# Altium PCB FPC_MAIN_TO_ES.PcbDoc
Units mil, origin at the board's own origin, x right, y up, seen from the top; angles counter-clockwise.
Board outline 244.62 x 487 mil, 2 copper layers (Top Layer, Bottom Layer), stack 3.76 mil thick; 2 components, 12 nets, 28 pads, 10 vias.
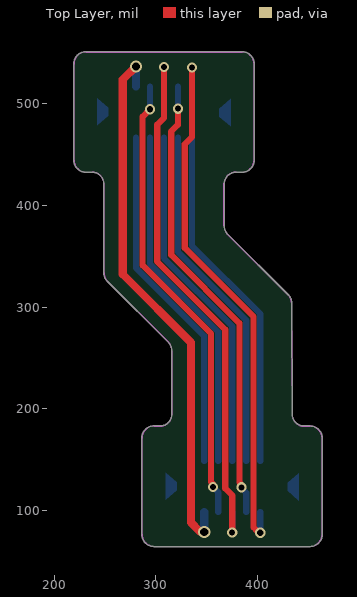
[diagram p0: Top Layer view]
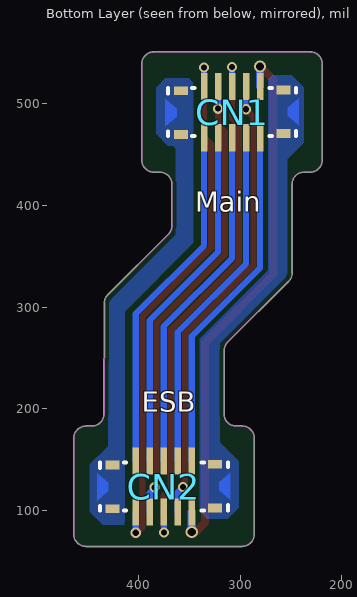
[diagram p1: Bottom Layer view, seen from below]

## Layer stack, top to bottom
Board Layer Stack Top Coverlay 1: solder mask 0.472, Polyimide, Dk 3.4
Top Layer: signal copper 1.38
Dielectric 1: core 1, PI, Dk 4.2
Bottom Layer: signal copper 1.38
Board Layer Stack Bottom Coverlay 1: solder mask 0.472, Polyimide, Dk 3.4

## Board outline
285.98,76.34 285.98,170.95 cw(c298.05,170.95) 298.3,183.02 303.71,182.91 ccw(c303.96,194.46) 315.51,194.45 315.51,256.97 315.5,257.14 ccw(c304.07,257.14) 312.41,264.94 312.28,265.08 252.05,325.31 251.96,325.38 cw(c260.63,333.61) 248.67,333.7 248.67,420.88 248.58,421.34 ccw(c237.04,421.07) 237.04,432.62 231.13,432.62 cw(c231.13,444.7) 219.06,444.7 219.06,539.18 cw(c231.13,539.18) 231.13,551.26 384.68,551.26 cw(c384.68,539.18) 396.75,539.18 396.75,444.7 cw(c384.68,444.7) 384.68,432.62 378.77,432.62 ccw(c378.77,421.07) 367.23,421.07 367.16,420.9 367.16,379.85 ccw(c378.53,379.76) 370.29,371.93 370.32,371.89 430.69,311.52 430.94,311.27 cw(c424.08,304.78) 433.52,304.78 433.52,304.7 434.15,194.45 ccw(c445.69,194.45) 445.69,182.91 451.6,182.91 cw(c451.6,170.83) 463.67,170.83 463.67,76.34 cw(c451.6,76.34) 451.6,64.26 298.05,64.26 cw(c298.05,76.34)

## Design rules (kind name [scope] priority, off if disabled: settings)
Clearance [All] p1: gap=4 ignorepadtopadclearanceinfootprint=TRUE
ComponentClearance [All] p1: gap=0 collisioncheckmode=3 verticalgap=0 showdistances=FALSE
HoleToHoleClearance [All] p1: gap=9 allowstackedmicrovias=TRUE
MinimumSolderMaskSliver [All] p1: minsoldermaskwidth=0
PlaneClearance [All] p1: clearance=10
PolygonConnect [All] p1: connectstyle=Direct reliefconductorwidth=10 reliefentries=4 polygonreliefangle="90 Angle" airgapwidth=10
RoutingVias [All] p1: holewidth=10 width=16 viastyle="Through Hole" minholewidth=4 minwidth=8 maxholewidth=28 maxwidth=50
SilkToSilkClearance [All] p1: silktosilkclearance=0
SilkToSolderMaskClearance [IsPad] p1: minsilkscreentomaskgap=0 clearancetoexposedcopper=TRUE
SolderMaskExpansion [All] p1: expansion=4 istentingtop=FALSE
Width [All] p1: maxlimit=30 minlimit=3.5 preferedwidth=6
24 further rules are at their usual default settings.

## Components (designator, comment, footprint, x,y, rotation, side; value= is the part's Value field where it differs from the comment)
CN1 "BK13C06-10DP/2-0.35V" CONN-SMD_10P-P0.35_BK13C06-10DP 372.76,517.31 r270 bottom
CN2 "BK13C06-10DP/2-0.35V" CONN-SMD_10P-P0.35_BK13C06-10DP 440.02,148.86 r270 bottom

## Footprints (in the part's own frame and the unit in brackets; to place one, negate y for a bottom-side part, rotate by r counter-clockwise, add the part's x,y. Pads: shape width x height; smd on the part's side, far side on the other; paste and mask are expansions set on the pad)
CONN-SMD_10P-P0.35_BK13C06-10DP [mm]
  rect 0.68x0.168 smd paste+0 mask+0.051: 1(1.288,0.95) 2(1.288,1.3) 3(1.288,1.65) 4(1.288,2) 5(1.288,2.35) 6(0.008,2.35) 7(0.008,2) 8(0.008,1.65) 9(0.008,1.3) 10(0.008,0.95)
  rect 0.22x0.35 smd paste+0 mask+0.051: 11(0.094,2.933) 12(1.184,2.933) 14(0.113,0.367) 15(1.203,0.367)
  Top Layer region: 0.978,3.318 0.738,3.038 0.738,3.038 0.538,3.038 0.538,3.038 0.298,3.318
  Top Layer region: 0.318,-0.018 0.558,0.262 0.558,0.262 0.758,0.262 0.758,0.262 0.998,-0.018
  silkscreen extent 0.05,0.05 1.25,3.25, body extent -0.16,0.12 1.44,3.17, height 0.48

## Part data
CN1 CN2: library part 10pin_dp_BK13C06-10DP/2-0.35V, JLCPCB Part Class="Extended Part", Manufacturer=null, Contributor=lcsc, Manufacturer Part=BK13C06-10DP/2-0.35V, spicePre=C, spiceSymbolName=BK13C06-10DP/2-0.35V, Supplier=LCSC, Supplier Part=C3040902

## Via types
v1: diameter 10, hole 6, Top Layer to Bottom Layer, 8 vias
v2: diameter 12, hole 8, Top Layer to Bottom Layer, 2 vias

## Nets (pads, with @x,y where several pads share a name; then routed paths per layer and width w, separated by ;. In a path a pad name is that pad's centre, name@x,y a point inside that pad or via, vN(x,y) a via of type N, cw(c..) or ccw(c..) an arc to the next point about the centre after c; other vN are vias at no path point)
AFE_CV_EN: CN1.3 CN2.8 | length 345.9
  Bottom Layer w6: CN1.3 307.8,348.15 375.06,280.88 CN2.8
GND: CN1.14 CN1.15 CN2.14 CN2.15
GPOUT: CN1.7 CN2.4 | length 452.3
  Top Layer w6: v1(294.02,494.64) 286.83,487.45 286.83,341.1 354.19,273.75 354.19,127.76 355.41,126.53 355.41,123.7 v1@355.95,123.16
  Bottom Layer w6: v1(294.02,494.64) CN1.7 ; v1(356.18,122.94) 356.18,122.68 361.28,117.58 CN2.4
I2C_SCL: CN1.8 CN2.3 | length 530.6
  Top Layer w6: v1(307.8,536.15) 307.8,486.02 301.26,479.48 301.26,344.76 368.18,277.84 368.18,121.43 375.06,114.55 375.06,78.12 v1(375,78.07)
  Bottom Layer w6: CN1.8 v1(307.8,536.15) ; v1@375.03,78.09 CN2.3
I2C_SDA: CN1.10 CN2.1 | length 531.4
  Top Layer w6: v1(335.36,535.68) 335.36,467.22 328.35,460.21 328.35,358.15 396.05,290.45 396.05,83 399.21,79.83 399.56,79.83 401.56,77.83 v1(402.64,77.83)
  Bottom Layer w6: CN1.10 v1(335.36,535.68) ; v1(402.64,77.83) CN2.1
M_AFE_ADC_RDY: CN1.4 CN2.7 | length 345.9
  Bottom Layer w6: CN1.4 294.02,342.68 361.28,275.41 CN2.7
M_AFE_GPIO2: CN1.9 CN2.2 | length 452.1
  Top Layer w6: v1(321.58,495.23) 321.58,479.35 315.06,472.83 315.06,351.35 382.18,284.23 382.18,127.23 383.28,126.13 383.28,123.3 v1(384.05,122.53)
  Bottom Layer w6: v1(321.58,495.23) CN1.9 ; v1(384.05,122.53) 384.05,121.96 388.84,117.17 CN2.2
RX: CN1.1 CN2.10 | length 345.9
  Bottom Layer w6: CN1.1 335.36,360.51 402.62,293.24 CN2.10
TX: CN1.2 CN2.9 | length 345.9
  Bottom Layer w6: CN1.2 321.58,354.19 388.84,286.92 CN2.9
VCC_3V3: CN1.6 CN2.5 | length 538.6
  Top Layer w8: v2(280.24,536.81) 267.27,523.84 267.27,332.21 334.3,265.18 334.3,87.98 343.08,79.2 346.74,79.2 v2(347.5,78.43)
  Bottom Layer w8: CN1.6 v2(280.24,536.81) ; v2(347.5,78.43) CN2.5
VSYS: CN1.11 CN1.12 CN2.11 CN2.12
WKUP: CN1.5 CN2.6 | length 345.9
  Bottom Layer w6: CN1.5 280.24,338.62 347.5,271.36 CN2.6

## Polygon pours and split planes (outlines as drawn)
VSYS on Bottom Layer "VSYS_L02_P005" (solid, remove dead copper, pour order 5): 249.25,528.01 267.98,528.01 272.17,523.82 272.17,336.04 339.51,268.71 339.51,99.15 331.8,91.44 312.1,91.44 301.04,102.5 301.04,148.26 319.82,167.04 319.82,264.39 253.77,330.44 253.77,445.48 237.37,461.89 237.37,516.14 249.26,528.02
GND on Bottom Layer "GND_L02_P003" (solid, remove dead copper, pour order 3): 350.24,525.24 373.39,525.24 382.64,516 382.64,470.43 370.91,458.7 366.34,458.7 363.22,455.57 363.22,371.24 429.86,304.6 429.86,163.07 447.85,145.08 447.85,98.46 435.18,85.79 413.73,85.79 413.68,85.74 413.5,85.91 413.5,295.45 345.82,363.13 345.82,520.82
no net on Bottom Layer "NONET_L02_P001" (solid, pour order 1): 349.52,522.62 349.54,522.6

## Keep-outs
Keep-Out Layer:
  lines w0.5: 248.82,421.22 248.94,421.09 248.94,333.71 ccw(c260.63,333.61) 252.15,325.56 ; 248.85,421.07 ccw(c237.04,421.07) 237.04,432.88 231.13,432.89 cw(c231.13,444.7) 219.32,444.7 219.32,539.18 cw(c231.13,539.18) 231.13,551 384.68,551 cw(c384.68,539.18) 396.49,539.18 396.49,444.7 cw(c384.68,444.7) 384.68,432.89 378.77,432.89 ccw(c378.77,421.07) 366.96,421.07 ; 312.52,265.19 312.55,265.19 ; 315.76,257.04 ccw(c304.07,257.14) 312.55,265.19 ; 315.77,257.13 315.77,194.45 cw(c303.96,194.45) 303.72,182.65 298.3,182.76 ccw(c298.05,170.95) 286.24,170.95 286.24,76.34 ccw(c298.05,76.34) 298.05,64.53 451.6,64.53 ccw(c451.6,76.34) 463.41,76.34 463.41,170.83 ccw(c451.6,170.83) 451.6,182.64 445.69,182.64 cw(c445.69,194.45) 433.88,194.45 433.26,304.7 ccw(c424.08,304.78) 430.74,311.1 430.5,311.33 370.09,371.74 ; 370.09,371.75 cw(c378.53,379.76) 366.9,379.86 366.9,421.74 ; 252.18,325.56 312.55,265.19 ; 252.15,325.56 252.18,325.56 ; 366.9,421.74 366.93,421.77

## Silkscreen, mask and mechanical layers (free items; w line width, h text height)
Board Layer Stack Bottom Overlay 1:
  text "Main" at 344.24,393.96 h19.68
  text "ESB" at 396.62,196.68 h19.68
Mechanical 1:
  lines w0.5: 248.82,421.05 ccw(c237.01,421.05) 237.01,432.87 231.1,432.87 cw(c231.1,444.68) 219.29,444.68 219.29,539.16 cw(c231.1,539.16) 231.1,550.98 384.65,550.98 cw(c384.65,539.16) 396.46,539.16 396.46,444.68 cw(c384.65,444.68) 384.65,432.87 378.74,432.87 ccw(c378.74,421.05) 366.93,421.05 ; 248.82,421.1 248.82,333.71 248.91,333.62 248.91,332.61 ; 248.94,332.41 ccw(c260.76,333.72) 252.11,325.56 ; 312.49,265.08 cw(c303.84,256.92) 315.66,258.23 315.66,194.37 ; 312.52,265.1 252.15,325.47 ; 315.81,194.3 cw(c304,194.3) 303.76,182.49 298.34,182.61 ccw(c298.1,170.8) 286.29,170.8 286.29,76.19 ccw(c298.1,76.19) 298.1,64.38 451.64,64.38 ccw(c451.64,76.19) 463.45,76.19 463.45,170.68 ccw(c451.64,170.68) 451.64,182.49 445.73,182.49 cw(c445.73,194.3) 433.92,194.3 ; 367.2,378.85 ccw(c379.02,380.16) 370.37,372 ; 367.25,378.84 367.25,421.14 ; 433.84,194.34 433.84,194.88 433.84,304.86 ccw(c422.02,303.55) 430.67,311.71 370.38,372 ; 252.13,325.47 252.15,325.47 ; 370.37,372 370.38,372
Mechanical 2:
  region: 389.36,550.18 393.27,547.57 395.88,543.66 396.79,539.05 396.56,444.44 396.79,444.44 395.88,439.84 393.27,435.93 389.36,433.32 384.75,432.4 384.51,432.45 379.09,432.75 231.21,432.75 231.21,432.52 226.6,433.44 222.69,436.05 220.08,439.96 219.17,444.56 219.4,539.05 219.17,539.05 220.08,543.66 222.69,547.57 226.6,550.18 231.21,551.09 384.75,550.86 384.75,551.09
  region: 456.27,181.69 460.17,179.08 462.78,175.18 463.7,170.57 463.47,76.08 463.7,76.08 462.78,71.47 460.17,67.56 456.27,64.95 451.66,64.04 298.11,64.27 298.11,64.04 293.51,64.95 289.6,67.56 286.99,71.47 286.07,76.08 286.3,170.57 286.07,170.57 286.99,175.18 289.6,179.08 293.51,181.69 298.11,182.61 445.75,182.38 451.66,182.38 451.66,182.61
  text "top   / reinforced material: stainless steel / 0.2mm" at 439.02,514.51 h15
Mechanical 5:
  drawing of 535 lines, arcs and shapes, not listed
Mechanical 6:
  drawing of 147 lines, arcs and shapes, not listed